# Altium PCB (OLD) Motors and Servos.PcbDoc
Units mm, origin at the board's own origin, x right, y up, seen from the top; angles counter-clockwise.
Board outline 88.2 x 113.22 mm, 2 copper layers (Top Layer, Bottom Layer); 83 components, 122 nets, 259 pads, 0 vias.
Unrouted connection lines stored in the file: 7.
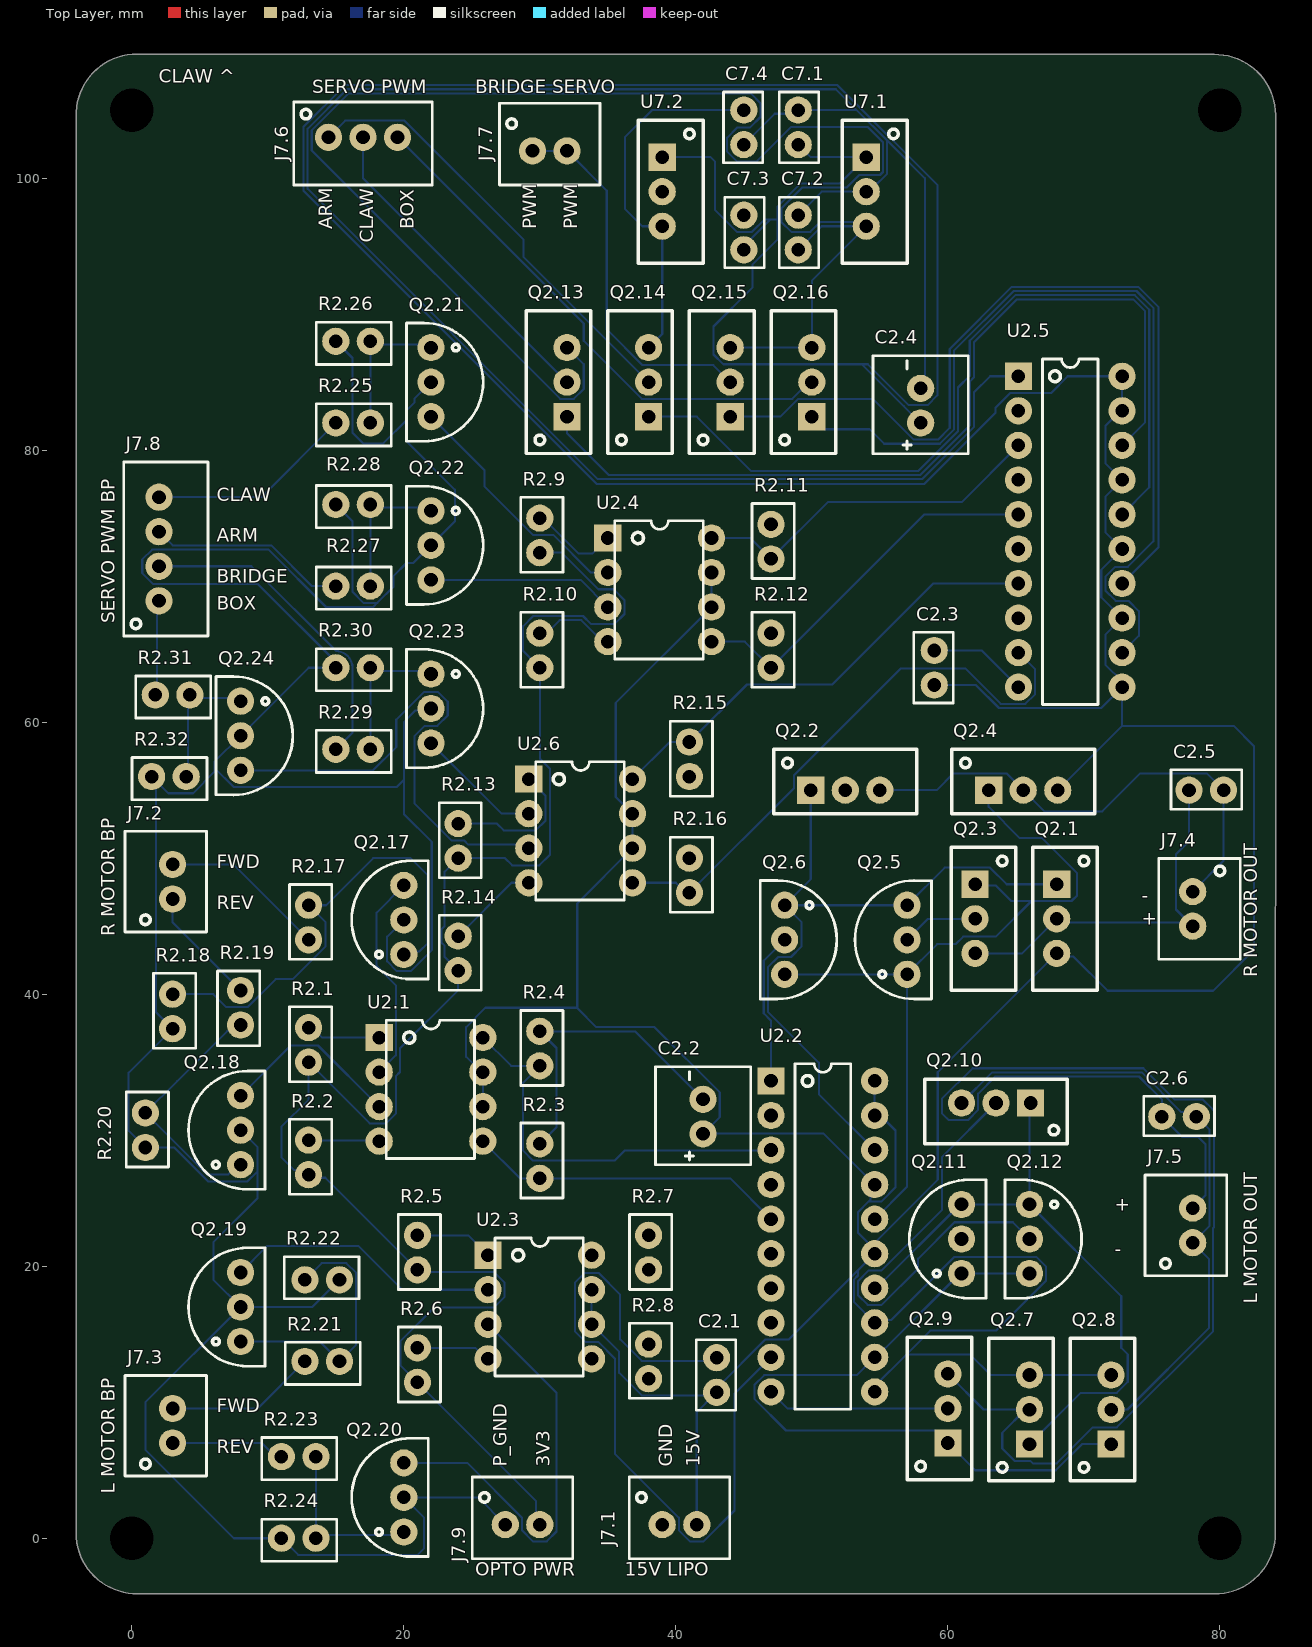
[diagram p0: Top Layer view]
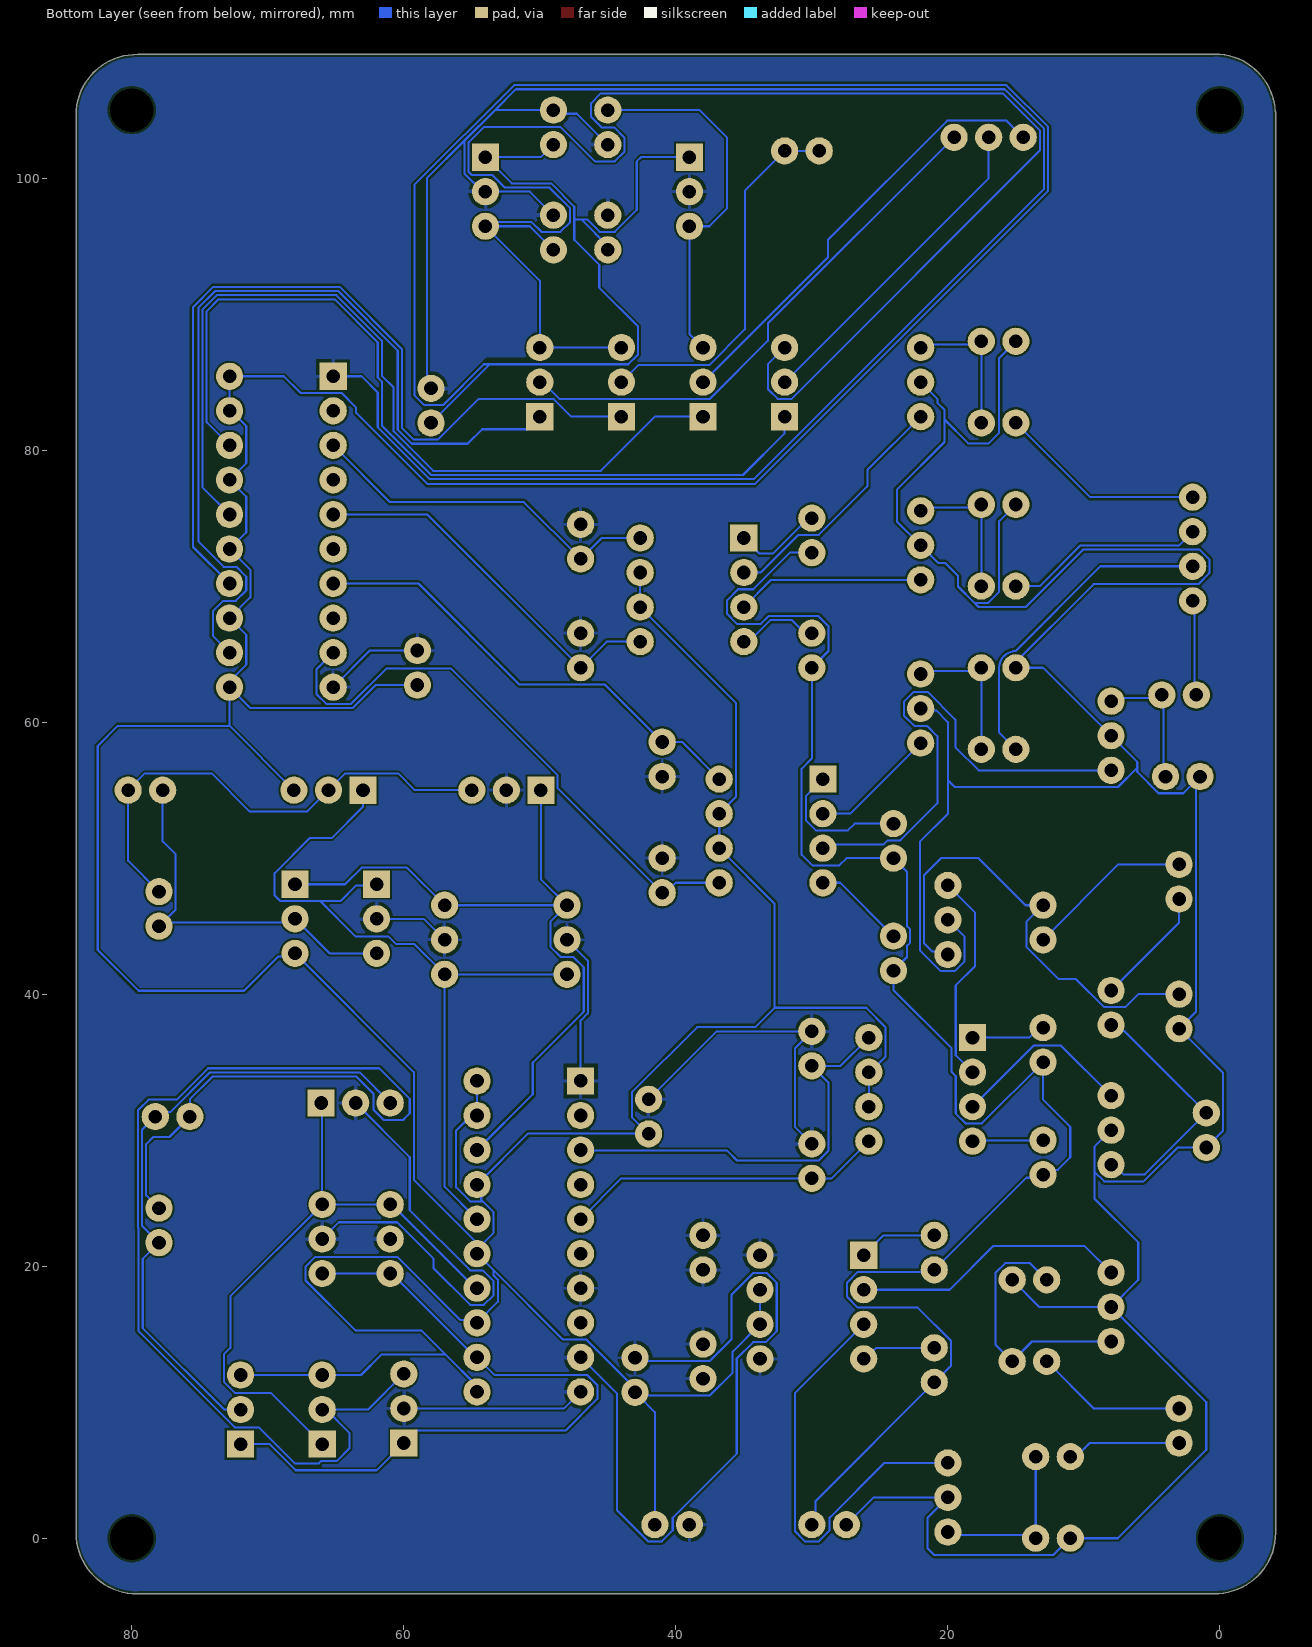
[diagram p1: Bottom Layer view, seen from below]
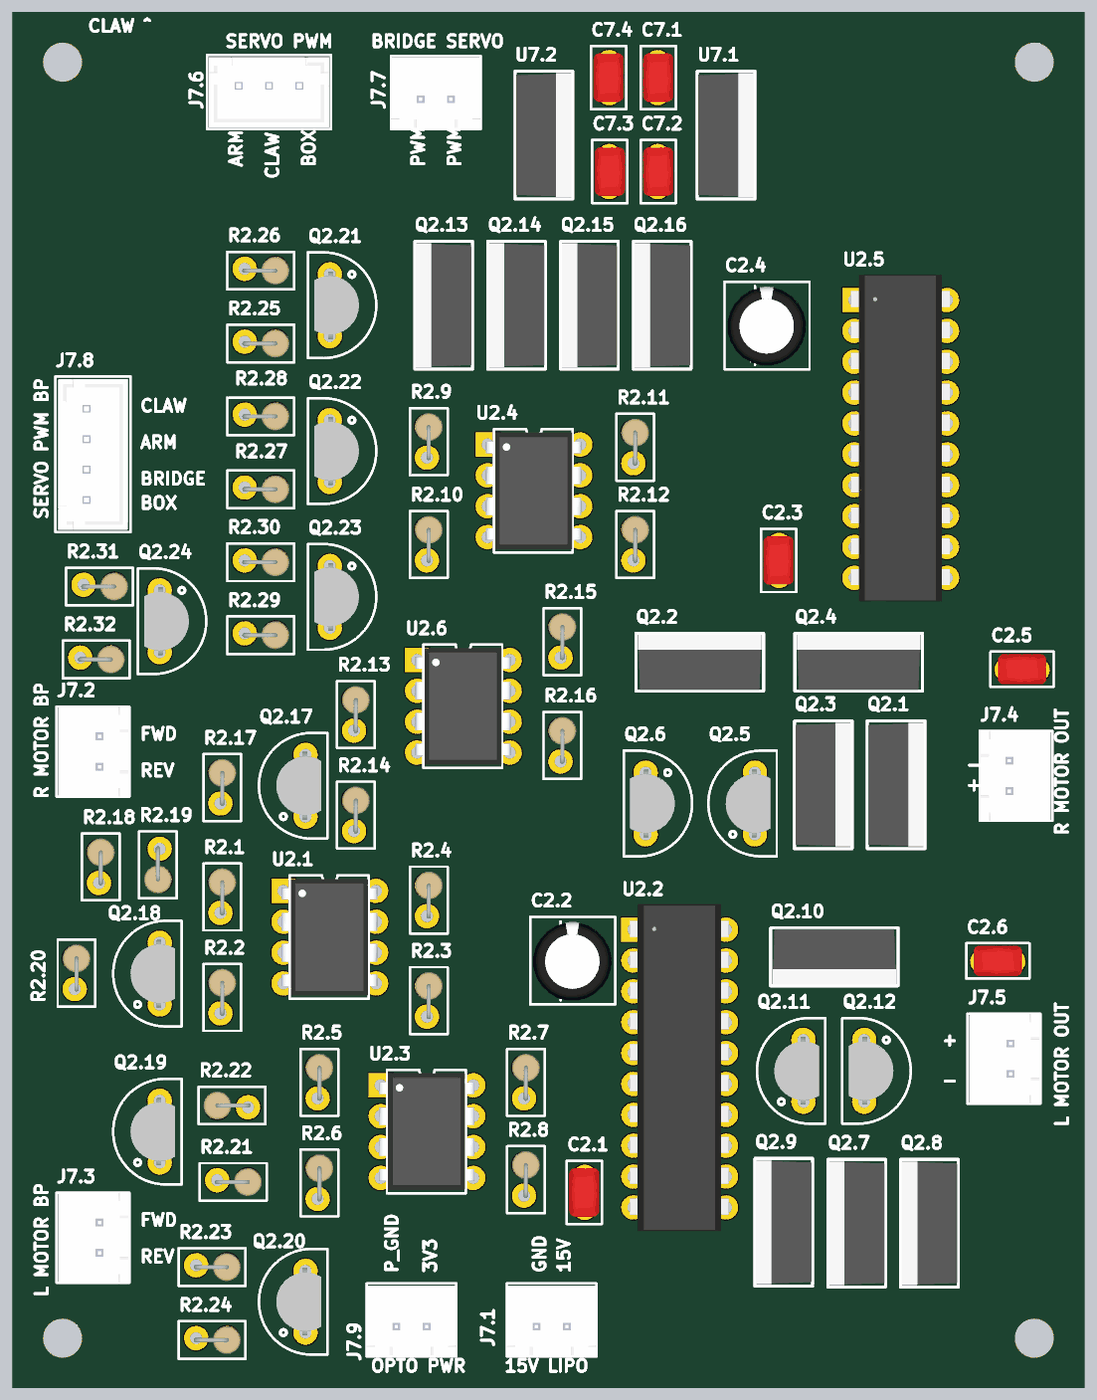
[diagram p2: 3D render of the assembled board from above, using the file's embedded part models]

## Layer stack, top to bottom
Top Solder: solder mask 0.0102, Solder Resist, Dk 3.5
Top Layer: signal copper 0.0356
Dielectric 1: dielectric 0.32, FR-4, Dk 4.8
Bottom Layer: signal copper 0.0356
Bottom Solder: solder mask 0.0102, Solder Resist, Dk 3.5

## Board outline
-4.1,0.387 ccw(c0.37,0.394) 0.443,-4.076 79.614,-4.1 ccw(c79.614,-4) 79.614,-4.1 ccw(c79.608,0.378) 84.086,0.378 ccw(c79.608,0.378) 84.086,0.452 84.1,92.5 ccw(c84,92.5) 84.1,92.5 84.1,104.623 ccw(c84,104.623) 84.098,104.644 ccw(c79.621,104.616) 79.556,109.093 ccw(c79.519,109) 79.519,109.1 0.445,109.1 ccw(c0.381,109.023) 0.381,109.123 ccw(c0.387,104.646) -4.084,104.868 ccw(c-4,104.814) -4.1,104.814

## Design rules (kind name [scope] priority, off if disabled: settings)
BoardOutlineClearance [All] p1: gap=0.2 ignorepadtopadclearanceinfootprint=FALSE
Clearance [All] p1: gap=0.152 ignorepadtopadclearanceinfootprint=FALSE
HoleSize [All] p1: absolutevalues=TRUE maxlimit=100 minlimit=0.4 maxpercent=80.000 minpercent=20.000
PolygonConnect [All] p1: connectstyle=Relief reliefconductorwidth=0.254 reliefentries=4 polygonreliefangle="90 Angle" airgapwidth=0.254
RoutingVias [All] p1: holewidth=0.4 width=0.8 viastyle="Through Hole" minholewidth=0.4 minwidth=0.6 maxholewidth=100 maxwidth=100
SilkToSilkClearance [All] p1: silktosilkclearance=0
SilkToSolderMaskClearance [IsPad] p1: minsilkscreentomaskgap=0 clearancetoexposedcopper=TRUE
SolderMaskExpansion [All] p1: expansion=0.102 istentingtop=FALSE
Width [All] p1: maxlimit=100 minlimit=0.152 preferedwidth=0.152
27 further rules are at their usual default settings.

## Components (designator, comment, footprint, x,y, rotation, side; value= is the part's Value field where it differs from the comment)
C2.1 "100p" "Non Polarized Cap" 43,12 r90 top
C2.2 "100u" "Polarized Cap" 42,31 r90 top
C2.3 "100p" "Non Polarized Cap" 59,64 r90 top
C2.4 "100u" "Polarized Cap" 58,83.27 r90 top
C2.5 "100n" "Non Polarized Cap" 79,55 r0 top
C2.6 "100n" "Non Polarized Cap" 77,31 r0 top
C7.1 "470n" "Non Polarized Cap" 49,103.73 r270 top
C7.2 "100n" "Non Polarized Cap" 49,96 r270 top
C7.3 "470n" "Non Polarized Cap" 45,96 r270 top
C7.4 "100n" "Non Polarized Cap" 45,103.73 r90 top
J7.1 "15V Lipo" "2pos JST" 40.27,1 r0 top
J7.2 "Right Motor BP" "2pos JST" 3,48.27 r90 top
J7.3 "Left Motor BP" "2pos JST" 3,8.27 r90 top
J7.4 "2pos" "2pos JST" 78,46.27 r270 top
J7.5 "2pos" "2pos JST" 78,23 r90 top
J7.6 "3pos" "3pos JST" 17,103 r0 top
J7.7 "2pos" "2pos JST" 30.73,102 r0 top
J7.8 "4pos" "4Pos JST" 2,72.73 r90 top
J7.9 "Optocoupler Power, Gnd" "2pos JST" 28.73,1 r0 top
Q2.1 "IRFZ44" TO220 68,45.54 r270 top
Q2.2 "IRFZ44" TO220 52.46,55 r0 top
Q2.3 "IRFZ44" TO220 62,45.54 r270 top
Q2.4 "IRFZ44" TO220 65.54,55 r0 top
Q2.5 "VN2222LL" VN2222LL 57,44 r90 top
Q2.6 "VN2222LL" VN2222LL 48,44 r270 top
Q2.7 "IRFZ44" TO220 66,9.46 r90 top
Q2.8 "IRFZ44" TO220 72,9.46 r90 top
Q2.9 "IRFZ44" TO220 60,9.54 r90 top
Q2.10 "IRFZ44" TO220 63.54,32 r180 top
Q2.11 "VN2222LL" VN2222LL 61,22 r90 top
Q2.12 "VN2222LL" VN2222LL 66,22 r270 top
Q2.13 "IRFZ44" TO220 32,85 r90 top
Q2.14 "IRFZ44" TO220 38,85 r90 top
Q2.15 "IRFZ44" TO220 44,85 r90 top
Q2.16 "IRFZ44" TO220 50,85 r90 top
Q2.17 "VN2222LL" VN2222LL 20,45.46 r90 top
Q2.18 "VN2222LL" VN2222LL 8,30 r90 top
Q2.19 "VN2222LL" VN2222LL 8,17 r90 top
Q2.20 "VN2222LL" VN2222LL 20,3 r90 top
Q2.21 "VN2222LL" VN2222LL 22,85 r270 top
Q2.22 "VN2222LL" VN2222LL 22,73 r270 top
Q2.23 "VN2222LL" VN2222LL 22,61 r270 top
Q2.24 "VN2222LL" VN2222LL 8,59 r270 top
R2.1 "330" Res_Generic 13,36.27 r90 top
R2.2 "330" Res_Generic 13,28 r90 top
R2.3 "1k" Res_Generic 30,27.73 r90 top
R2.4 "1k" Res_Generic 30,36 r90 top
R2.5 "330" Res_Generic 21,21 r90 top
R2.6 "330" Res_Generic 21,12.73 r90 top
R2.7 "1k" Res_Generic 38,21 r90 top
R2.8 "1k" Res_Generic 38,13 r90 top
R2.9 "330" Res_Generic 30,73.73 r90 top
R2.10 "330" Res_Generic 30,65.27 r90 top
R2.11 "1k" Res_Generic 47,73.27 r90 top
R2.12 "1k" Res_Generic 47,65.27 r90 top
R2.13 "330" Res_Generic 24,51.27 r90 top
R2.14 "330" Res_Generic 24,43 r90 top
R2.15 "1k" Res_Generic 41,57.27 r90 top
R2.16 "1k" Res_Generic 41,48.73 r90 top
R2.17 "1k" Res_Generic 13,45.27 r90 top
R2.18 "10k" Res_Generic 3,38.73 r90 top
R2.19 "1k" Res_Generic 8,39 r270 top
R2.20 "10k" Res_Generic 1,30 r90 top
R2.21 "1k" Res_Generic 14,13 r0 top
R2.22 "10k" Res_Generic 14,19 r180 top
R2.23 "1k" Res_Generic 12.27,6 r0 top
R2.24 "10k" Res_Generic 12.27,0 r0 top
R2.25 "1k" Res_Generic 16.27,82 r0 top
R2.26 "10k" Res_Generic 16.27,88 r0 top
R2.27 "1k" Res_Generic 16.27,70 r0 top
R2.28 "10k" Res_Generic 16.27,76 r0 top
R2.29 "1k" Res_Generic 16.27,58 r0 top
R2.30 "10k" Res_Generic 16.27,64 r0 top
R2.31 "1k" Res_Generic 3,62 r0 top
R2.32 "10k" Res_Generic 2.73,56 r0 top
U2.1 "MCT6" DIP8 22,33 r0 top
U2.2 "LT1161IN" DIP20 50.81,22.19 r0 top
U2.3 "MCT6" DIP8 30,17 r0 top
U2.4 "MCT6" DIP8 38.81,69.73 r0 top
U2.5 "LT1161IN" DIP20 69,74 r0 top
U2.6 "MCT6" DIP8 33,52 r0 top
U7.1 "5V SNS" TO220 54,99 r270 top
U7.2 "5V SNS" TO220 39,99 r270 top

## Footprints (in the part's own frame and the unit in brackets; to place one, negate y for a bottom-side part, rotate by r counter-clockwise, add the part's x,y. Pads: shape width x height; smd on the part's side, far side on the other; paste and mask are expansions set on the pad)
"2pos JST" [mm]
  round 2 hole 1: 1(-1.27,0) 2(1.27,0)
  silkscreen extent -3.7,-2.5 3.7,3.5, body extent -3.7,-2.4 3.7,3.35, height 7.01
"3pos JST" [mm]
  round 2 hole 1: 1(-2.54,0) 2(0,0) 3(2.54,0)
  silkscreen extent -5.1,-3.5 5.1,2.6, body extent -4.95,-3.35 4.95,2.4, height 7
"4Pos JST" [mm]
  round 2 hole 1: 1(-3.81,0) 2(-1.27,0) 3(1.27,0) 4(3.81,0)
  silkscreen extent -6.4,-3.6 6.4,2.6, body extent -6.2,-3.38 6.2,2.37, height 7.01
DIP8 [mm]
  rect 2x2 hole 1: 1(-3.81,3.81)
  round 2 hole 1: 2(-3.81,1.27) 3(-3.81,-1.27) 4(-3.81,-3.81) 5(3.81,-3.81) 6(3.81,-1.27) 7(3.81,1.27) 8(3.81,3.81)
  silkscreen extent -3.3,-5.08 3.2,5.08, body extent -3.96,-4.79 3.91,4.79, height 5.33
DIP20 [mm]
  rect 2x2 hole 1: 1(-3.81,11.43)
  round 2 hole 1: 2(-3.81,8.89) 3(-3.81,6.35) 4(-3.81,3.81) 5(-3.81,1.27) 6(-3.81,-1.27) 7(-3.81,-3.81) 8(-3.81,-6.35) 9(-3.81,-8.89) 10(-3.81,-11.43) 11(3.81,-11.43) 12(3.81,-8.89) 13(3.81,-6.35) 14(3.81,-3.81) 15(3.81,-1.27) 16(3.81,1.27) 17(3.81,3.81) 18(3.81,6.35) 19(3.81,8.89) 20(3.81,11.43)
  silkscreen extent -2.04,-12.7 2.04,12.7, body extent -4.09,-13.39 4.04,13.53, height 3.81
"Non Polarized Cap" [mm] "Cap Generic THT"
  round 2 hole 1: 1(-1.27,0) 2(1.27,0)
  silkscreen extent -2.6,-1.4 2.6,1.5, body extent -2,-1.2 2,1.3, height 6
"Polarized Cap" [mm]
  round 2 hole 1: 1(-1.27,0) 2(1.27,0)
  silkscreen extent -3.53,-3.5 3.66,3.5, body extent -3.25,-3.22 3.25,3.28, height 11.37
Res_Generic [mm] "Cap Generic THT Footprint"
  round 2 hole 1: 1(-1.27,0) 2(1.27,0)
  silkscreen extent -2.71,-1.7 2.8,1.4, body extent -1.47,-1.3 2.4,1, height 8.18
TO220 [mm]
  rect 2x2 hole 1: 1(-2.54,0)
  round 2 hole 1: 2(0,0) 3(2.54,0)
  silkscreen extent -5.25,-1.75 5.25,3, body extent -5.08,-1.66 5.08,2.91, height 19.6
VN2222LL [mm]
  round 2 hole 1: 1(-2.54,0) 2(0,0) 3(2.54,0)
  silkscreen extent -4.35,-1.8 4.35,3.83, body extent -2.78,-1.28 2.78,2.4, height 7.82

## Part data
C2.1 C2.3 C2.5 C2.6 C7.1 C7.2 C7.3 C7.4: library part Cap_Generic
C2.2 C2.4: library part "Polarized Cap"
J7.1 J7.2 J7.3 J7.4 J7.5 J7.7 J7.9: library part "2pos Conn", "2pos Conn JST"
J7.6: library part "3pos Conn", "3pos Conn"
J7.8: library part "4pos Conn", "4pos Conn"
Q2.1 Q2.2 Q2.3 Q2.4 Q2.7 Q2.8 Q2.9 Q2.10 Q2.13 Q2.14 Q2.15 Q2.16: library part "IRFZ44 NMOS", "IRFZ44EPBF N-Channel 60 V 48A 110W Through Hole TO-220AB", Supplier Part Number 1=IRFZ44ZLPBF-ND, Supplier 1=Digi-Key
Q2.5 Q2.6 Q2.11 Q2.12 Q2.17 Q2.18 Q2.19 Q2.20 Q2.21 Q2.22 Q2.23 Q2.24: library part "VN2222LL NMOS", "VN2222LL N-Channel 60 V 150mA 400mW Through Hole TO-92 (TO-226)", Supplier Part Number 1=689-VN2222LL-G, Supplier 1=Mouser
R2.1 R2.2 R2.3 R2.4 R2.5 R2.6 R2.7 R2.8 R2.9 R2.10 R2.11 R2.12 R2.13 R2.14 R2.15 R2.16 R2.17 R2.18 R2.19 R2.20 R2.21 R2.22 R2.23 R2.24 R2.25 R2.26 R2.27 R2.28 R2.29 R2.30 R2.31 R2.32: library part Res_Generic
U2.1 U2.3 U2.4 U2.6: library part "MCT6 Optocoupler", "Optoisolator 5.3KV 2CH TRANS 8-DIP", Supplier Part Number 1=512-MCT6, Supplier 1=Mouser
U2.2 U2.5: library part "LT1161IN Gate Driver", "LT1161IN High-Side Gate Driver IC Non-Inverting 20-PDIP", Supplier Part Number 1=LT1161IN#PBF-ND, Supplier 1=Digi-Key
U7.1 U7.2: library part "UA7805 5V Reg", "UA7805 IC REG LINEAR 5V 1.5A TO220-3", Supplier Part Number 1=296-39515-5-ND, Supplier 1=Digi-Key

## Free pads (board coordinates)
  round 0 hole 3.2: ""(0,0) ""(0,105) ""(80,0) ""(80,105)

## Nets (pads, with @x,y where several pads share a name; then routed paths per layer and width w, separated by ;. In a path a pad name is that pad's centre, name@x,y a point inside that pad or via, vN(x,y) a via of type N, cw(c..) or ccw(c..) an arc to the next point about the centre after c; other vN are vias at no path point)
3.3V_P: J7.9.2 R2.1.1 R2.2.1 R2.5.1 R2.6.1 R2.9.1 R2.10.1 R2.13.1 R2.14.1 | length 128
  Bottom Layer w0.152: 22.988,44.996 22.771,44.779 22.771,43.785 23,43.556 23,42.73 R2.14.1 24,40.297 19.723,36.02 19.723,34.282 19.419,33.977 19.419,31.221 18.699,30.501 17.499,30.501 R2.1.1 13,32.245 11,30.245 11,28 11.919,27.081 12.649,27.081 13.229,26.501 14.229,26.501 R2.5.1 21.149,19.581 26.616,19.581 27.419,18.779 27.419,17.761 26.616,16.959 22.221,16.959 19.771,14.509 19.771,12.689 R2.6.1 29.731,2.729 29.731,1.269 J7.9.2 ; 23,44.984 23,49 R2.13.1 27.438,50 27.973,49.466 29.966,49.466 30.75,50.25 30.75,56.573 30,57.323 R2.10.1 28.771,65.229 28.771,67.049 29.527,67.805 33.175,67.805 33.748,67.231 35.509,67.231 36.229,67.951 36.229,68.969 35.426,69.771 34.307,69.771 31.619,72.46 R2.9.1
5V_ARM: C7.4.2 Q2.14.3 U7.2.3 | length 27.4
  Bottom Layer w0.152: Q2.14.3 39,88.54 U7.2.3 37.54,96.46 36.25,97.75 36.25,103 38.25,105 C7.4.2
5V_P: 
5V_SERVO: C7.2.2 Q2.13.3 Q2.15.3 Q2.16.3 U7.1.3 | length 126.7
  Bottom Layer w0.152: Q2.13.3 33.229,86.311 33.229,84.491 32.509,83.771 31.491,83.771 13.231,102.031 13.231,103.509 15.951,106.229 45.509,106.229 46.229,105.509 46.229,104.491 45.468,103.73 44.532,103.73 43.771,102.969 43.771,101.951 44.491,101.231 45.951,101.231 48.491,103.771 54.092,103.771 55.229,102.635 55.229,100.445 55.012,100.229 53.491,100.229 52.567,99.305 49.297,99.305 47.771,97.779 47.771,96.761 48.491,96.041 49.88,96.041 50.604,96.765 53.695,96.765 U7.1.3 ; Q2.15.3 Q2.16.3 50,92.46 U7.1.3 ; C7.2.2 50.73,96.46 U7.1.3
8V: 
15V: C2.1.1 C2.2.1 C2.3.1 C2.4.1 C7.1.2 C7.3.2 J7.1.2 Q2.1.3 Q2.4.3 Q2.7.3 Q2.8.3 U2.1.6 U2.1.7 U2.2.11 U2.2.13 U2.2.15 U2.2.17 U2.2.19 U2.2.20 U2.3.6 U2.3.7 U2.4.6 U2.4.7 U2.5.11 U2.5.13 U2.5.15 U2.5.17 U2.5.19 U2.5.20 U2.6.6 U2.6.7 U7.1.1 U7.2.1 | length 525.2
  Bottom Layer w0.152: U2.1.6 25.81,34.16 24.581,35.389 24.581,37.581 26,39 32.73,39 34.155,37.575 38.433,37.575 43.229,32.779 43.229,30.959 C2.2.1 ; 32.75,38.98 32.75,46.67 U2.6.6 U2.6.7 35.581,54.499 35.581,61.421 U2.4.6 U2.4.7 ; U2.3.7 U2.3.6 35.827,13.713 35.827,12.165 37.491,10.501 C2.1.1@42.771,10.501 ; U7.2.1 42.562,101.54 42.871,101.231 42.871,97.662 44.491,96.041 45.603,96.041 46.527,96.965 46.958,96.965 ; J7.1.2 41.54,9.27 C2.1.1@42.771,10.501 ; C2.2.1@42.039,29.769 50.851,29.769 U2.2.17 54.305,25.685 54.305,24.882 54.194,24.771 ; C7.3.2 45,95.007 46.958,96.965 ; C7.1.2 49.92,101.54 U7.1.1 52.07,99.61 49.171,99.61 47.467,97.905 47.467,96.965 ; 53.718,86.282 56.771,83.229 C2.4.1 ; U2.2.15@54.512,21.615 59.258,26.361 59.258,34.258 Q2.1.3 68.229,42.771 69.229,42.771 71.75,40.25 79.5,40.25 82.5,43.25 82.5,58.25 81.02,59.73 72.81,59.73 ; U2.2.11 54.62,11.191 56.929,13.5 ; U2.2.20 U2.2.19 55.051,31.08 56.153,29.978 56.153,25.796 55.129,24.771 54.194,24.771 ; C2.3.1 62.065,62.73 63.759,61.037 71.277,61.037 U2.5.11 ; Q2.4.3 72.81,59.73 ; Q2.8.3 Q2.7.3 63.15,12 61.65,13.5 56.929,13.5 ; C2.1.1@42.771,10.501 C2.1.1 43,11.038 46.574,14.611 48.311,14.611 53.391,19.691 ; 46.958,96.965 47.467,96.965 ; 47.467,96.965 47.467,95.459 45.631,93.624 45.631,91.945 42.771,89.085 42.771,87.031 43.491,86.311 54.12,86.311 57.12,83.311 58.509,83.311 59.229,84.031 59.229,99.497 51.887,106.838 15.699,106.838 12.622,103.761 12.622,99.084 34.206,77.5 58.25,77.5 63.5,82.75 63.5,83.125 64.576,84.201 67.588,84.201 68.817,85.43 U2.5.20 72.81,83 71.581,81.771 71.581,79.039 U2.5.17 71.581,76.581 71.581,73.959 U2.5.15 71.277,71.197 71.277,69.183 U2.5.13 71.581,66.421 71.581,64.23 72.81,63.001 U2.5.11 ; 53.391,19.691 53.391,19.32 53.087,19.015 53.087,17.373 U2.2.13 54.826,16.046 55.849,16.046 60.491,20.689 66.509,20.689 67.229,19.969 67.229,18.951 63.543,15.265 58.694,15.265 56.929,13.5 ; 53.391,19.691 U2.2.15 54.425,21.115 54.425,21.42 53.391,22.453 53.391,23.969 54.194,24.771 ; 72.81,59.73 U2.5.11
ARM_SERV_BP_IN: J7.8.3 R2.27.1 | length 14.7
  Bottom Layer w0.152: J7.8.3 3,73 10.25,73 13.25,70 R2.27.1
ARM_SERV_BP_OUT: 
ARM_SERV_PWM: J7.6.1 Q2.14.2 | length 32.8
  Bottom Layer w0.152: J7.6.1 15.689,104.229 20.049,104.229 28.816,95.462 28.816,94.184 Q2.14.2
BOX_SERV_BP_IN: J7.8.1 R2.31.1 | length 7
  Bottom Layer w0.152: R2.31.1 1.865,62.135 1.865,68.785 J7.8.1
BOX_SERV_BP_OUT: 
BOX_SERV_PWM: J7.6.3 Q2.16.2 | length 39.7
  Bottom Layer w0.152: J7.6.3 33.229,89.311 33.229,88.034 37.491,83.771 48.557,83.771 49.786,85 Q2.16.2
BRIDGE_SERV_BP_IN: J7.8.2 R2.29.1 | length 24
  Bottom Layer w0.152: J7.8.2 8.79,71.46 15.022,65.228 cw(c15,64) 16.228,64.022 16.229,59.229 R2.29.1
BRIDGE_SERV_BP_OUT: 
BRIDGE_SERV_PWM: J7.7.1 J7.7.2 Q2.15.2 | length 27.6
  Bottom Layer w0.152: J7.7.1 J7.7.2 34.922,99.078 34.922,88.88 37.552,86.25 42.75,86.25 Q2.15.2
CLAW_SERV_BP_IN: J7.8.4 R2.25.1 | length 15.3
  Bottom Layer w0.152: J7.8.4 9.54,76.54 R2.25.1
CLAW_SERV_BP_OUT: 
CLAW_SERV_PWM: J7.6.2 Q2.13.2 | length 24.2
  Bottom Layer w0.152: J7.6.2 17,100 Q2.13.2
DCLK: 
DIO: 
ECHO_F_M: 
ECHO_S_L: 
ECHO_S_R: 
ECHO_SPARE: 
ENCODER_L: 
ENCODER_R: 
IR_LEFT_TRANS: 
IR_RIGHT_TRANS: 
IR_SNS_LEFT: 
IR_SNS_RIGHT: 
LEFT+: C2.6.1 J7.5.2 Q2.7.2 Q2.9.3 | length 99.7
  Bottom Layer w0.152: Q2.9.3 62.62,9.46 Q2.7.2@65.71,9.46 ; Q2.7.2 Q2.7.2@65.71,9.46 ; J7.5.2 78.945,25.215 78.945,28.975 78.42,29.5 77.23,29.5 C2.6.1 75.73,32.27 74.055,33.945 63.482,33.945 62.229,32.692 62.229,31.491 61.488,30.75 60.055,30.75 59.966,30.839 59.563,31.242 59.563,32.301 61.817,34.555 74.376,34.555 76.681,32.25 78.758,32.25 79.466,31.542 79.466,31.534 79.555,31.445 79.555,22.854 79.5,22.799 79.5,15.222 72.426,8.149 70.662,8.149 68.014,5.5 66.25,5.5 66.087,5.663 64.934,5.663 64,6.597 64,7.75 Q2.7.2@65.71,9.46
LEFT-: C2.6.2 J7.5.1 Q2.8.2 Q2.10.3 | length 46.2
  Bottom Layer w0.152: Q2.10.3 63.25,34.25 74.25,34.25 77.169,31.331 77.939,31.331 79.25,30.02 79.25,22.98 J7.5.1 79.195,20.535 79.195,15.445 73.21,9.46 Q2.8.2
LEFT_FWD: Q2.7.1 Q2.10.1 Q2.11.3 Q2.12.1 U2.2.14 | length 46.6
  Bottom Layer w0.152: U2.2.14 54.73,18.38 60.89,24.54 Q2.11.3 Q2.12.1 ; Q2.7.1 69.769,10.689 72.426,10.689 73.229,11.491 73.229,13.521 72.75,14 72.75,17.79 Q2.12.1 ; Q2.10.1 66,31.92 Q2.12.1
LEFT_FWD_BP_IN: J7.3.2 R2.21.1 | length 11.2
  Bottom Layer w0.152: J7.3.2 9.27,9.54 R2.21.1
LEFT_FWD_BP_OUT: 
LEFT_REV: Q2.8.1 Q2.9.1 Q2.11.1 Q2.12.3 U2.2.12 | length 53.8
  Bottom Layer w0.152: Q2.12.3 Q2.11.1 60.89,19.46 54.73,13.3 U2.2.12 53.309,11.989 48.983,11.989 46.491,11.989 45.771,11.269 45.771,10.251 48.099,7.924 59.076,7.924 62,5 67.945,5 69.865,6.92 Q2.8.1
LEFT_REV_BP_IN: J7.3.1 R2.23.1 | length 8.4
  Bottom Layer w0.152: J7.3.1 9.555,7 10.555,6 R2.23.1
LEFT_REV_BP_OUT: 
M_GND: C2.1.2 C2.2.2 C2.3.2 C2.4.2 C7.1.1 C7.2.1 C7.3.1 C7.4.1 J7.1.1 Q2.2.2 Q2.3.2 Q2.5.2 Q2.6.2 Q2.9.2 Q2.10.2 Q2.11.2 Q2.12.2 R2.3.2 R2.4.2 R2.7.1 R2.7.2 R2.8.1 R2.8.2 R2.11.2 R2.12.2 R2.15.1 R2.16.2 U2.2.1 U2.2.7 U2.2.9 U2.2.10 U2.3.5 U2.3.8 U2.5.1 U2.5.10 U7.1.2 U7.2.2 | length 307
  Bottom Layer w0.152: R2.3.2 31.229,30.229 31.229,36.041 R2.4.2 37,37.27 C2.2.2 ; C2.1.2 42.771,13.041 37.491,13.041 35.905,14.627 35.905,17.913 34.319,19.499 33.301,19.499 32.581,18.779 32.581,15.221 33.384,14.419 34.319,14.419 35.523,13.215 35.523,6.215 40.229,1.509 40.229,0.574 41.031,-0.229 42.049,-0.229 44.316,2.038 44.316,10.616 U2.2.9 ; C7.3.1 C7.3.1@45.165,97.435 ; C7.4.1 47.271,104.731 48.731,104.731 C7.1.1 53.294,105 ; U2.2.10@46.75,11.5 47,11.25 U2.2.10 48.229,9.531 59.991,9.531 Q2.9.2 ; U2.2.1 47,38.053 46.467,38.586 46.467,42.467 Q2.6.2 ; C7.2.1 50.73,99 53.569,99 53.874,99.305 54.519,99.305 55.533,100.319 55.533,102.761 ; Q2.5.2 58.54,45.54 Q2.3.2 ; C2.4.2 58.305,84.845 58.305,99.99 55.533,102.761 ; C2.3.2 62.49,65.27 U2.5.10 ; Q2.10.2 59.563,28.023 59.563,24.126 55.129,19.691 54.194,19.691 53.391,18.889 53.391,17.871 54.111,17.151 55.129,17.151 57.81,19.832 57.81,20.548 60.491,23.229 64.771,23.229 Q2.12.2 ; U2.5.1 63.106,85.43 61.914,84.238 61.914,81.685 58.098,77.868 34.269,77.868 12.927,99.21 12.927,103.635 15.825,106.533 51.761,106.533 53.294,105 ; 53.294,105 55.533,102.761
MAGNET_SNS: 
NetC1.1_1: 
NetC1.1_2: 
NetC1.2_1: 
NetC1.2_2: 
NetC4.1_2: 
NetQ2.13_1: Q2.13.1 U2.5.18 | length 64.7
  Bottom Layer w0.152: Q2.13.1 32,81.231 35.059,78.173 57.971,78.173 61.61,81.811 61.61,85.035 61.914,85.34 61.914,87.914 65.086,91.086 73.621,91.086 74.5,90.207 74.5,82.04 U2.5.18
NetQ2.14_1: Q2.14.1 U2.5.16 | length 63.5
  Bottom Layer w0.152: Q2.14.1 41.54,82.46 45.522,78.478 57.845,78.478 60.748,81.38 60.748,84.604 61.61,85.466 61.61,88.041 64.959,91.39 73.748,91.39 74.805,90.333 74.805,77.265 U2.5.16
NetQ2.15_1: Q2.15.1 U2.5.14 | length 63.4
  Bottom Layer w0.152: Q2.15.1 47.677,82.46 48.967,83.75 54.512,83.75 57.491,80.771 59.277,80.771 60.138,81.633 60.138,87.432 64.707,92 74,92 75.5,90.5 75.5,72.88 U2.5.14
NetQ2.16_1: Q2.16.1 U2.5.12 | length 63.9
  Bottom Layer w0.152: Q2.16.1 50.924,81.536 54.245,81.536 55.314,80.467 59.403,80.467 60.443,81.507 60.443,87.305 64.833,91.695 73.874,91.695 75.11,90.459 75.11,73.292 73.236,71.419 72.301,71.419 71.581,70.699 71.581,69.681 72.342,68.92 73.278,68.92 74.039,68.159 74.039,66.339 U2.5.12
NetQ2.17_1: Q2.17.1 R2.17.2 R2.18.2 | length 34.8
  Bottom Layer w0.152: R2.18.2 5.992,40 6.951,39.041 8.509,39.041 10.578,41.11 11.848,41.11 14.229,43.491 14.229,45.311 R2.17.2 14.29,46.54 17.75,50 20.5,50 21.75,48.75 21.75,43.75 21.139,43.139 20.219,43.139 Q2.17.1
NetQ2.17_3: Q2.17.3 U2.1.2 | length 15.7
  Bottom Layer w0.152: U2.1.2 19.419,35.499 19.419,40.649 18,42.068 18,46 Q2.17.3
NetQ2.18_1: Q2.18.1 R2.19.2 R2.20.2 | length 18.8
  Bottom Layer w0.152: Q2.18.1 7.809,27.46 7.099,26.75 5.52,26.75 R2.20.2 3.336,33.606 7.014,37.284 7.054,37.284 7.5,37.73 R2.19.2
NetQ2.18_3: Q2.18.3 U2.1.3 | length 13.6
  Bottom Layer w0.152: Q2.18.3 11.689,36.229 13.691,36.229 U2.1.3
NetQ2.19_1: Q2.19.1 R2.21.2 R2.22.2 | length 19.5
  Bottom Layer w0.152: Q2.19.1 13.81,14.46 R2.21.2 16.499,14.229 16.499,19.509 15.779,20.229 13.959,20.229 R2.22.2
NetQ2.19_3: Q2.19.3 U2.3.2 | length 20.3
  Bottom Layer w0.152: Q2.19.3 9.96,21.5 16.644,21.5 19.874,18.27 U2.3.2
NetQ2.20_1: Q2.20.1 R2.23.2 R2.24.2 | length 13
  Bottom Layer w0.152: R2.23.2 R2.24.2 13.77,0.23 19.77,0.23 Q2.20.1 Q2.20.1@20.23,0.23
NetQ2.20_3: Q2.20.3 U2.3.3 | length 31.8
  Bottom Layer w0.152: Q2.20.3 24.658,5.54 28.689,1.509 28.689,0.574 29.491,-0.229 30.509,-0.229 31.229,0.491 31.229,10.691 U2.3.3
NetQ2.21_1: Q2.21.1 R2.25.2 R2.26.2 | length 10.7
  Bottom Layer w0.152: R2.25.2 R2.26.2 17.77,87.77 21.77,87.77 Q2.21.1
NetQ2.21_3: Q2.21.3 U2.4.2 | length 18.4
  Bottom Layer w0.152: Q2.21.3 25.922,78.538 25.922,77.34 29.491,73.771 30.979,73.771 33.75,71 U2.4.2
NetQ2.22_1: Q2.22.1 R2.27.2 R2.28.2 | length 10.7
  Bottom Layer w0.152: R2.27.2 R2.28.2 17.77,75.77 21.77,75.77 Q2.22.1
NetQ2.22_3: Q2.22.3 U2.4.3 | length 13.8
  Bottom Layer w0.152: Q2.22.3 33,70.46 U2.4.3
NetQ2.23_1: Q2.23.1 R2.29.2 R2.30.2 | length 10.7
  Bottom Layer w0.152: R2.29.2 R2.30.2 17.77,63.77 21.77,63.77 Q2.23.1
NetQ2.23_3: Q2.23.3 U2.6.2 | length 9.3
  Bottom Layer w0.152: Q2.23.3 27.19,53.27 U2.6.2
NetQ2.24_1: Q2.24.1 R2.31.2 R2.32.2 | length 10
  Bottom Layer w0.152: R2.32.2 4.135,56.135 4.135,61.865 R2.31.2 4.5,61.77 7.77,61.77 Q2.24.1
NetQ2.24_3: Q2.24.3 U2.6.3 | length 37.9
  Bottom Layer w0.152: Q2.24.3 17.738,56.46 19.445,58.168 19.445,60.183 21.491,62.229 22.509,62.229 23.229,61.509 23.229,60.491 22.467,59.73 21.532,59.73 20.771,58.969 20.771,54.031 23.491,51.311 24.426,51.311 24.738,51 28.92,51 U2.6.3
NetR1.12_1: 
NetR1.14_2: 
NetR1.17_1: 
NetR1.19_2: 
NetR1.23_2: 
NetR1.24_2: 
NetR1.26_2: 
NetR1.28_2: 
NetR1.30_2: 
NetR2.1_2: R2.1.2 U2.1.1 | length 5.5
  Bottom Layer w0.152: R2.1.2 13.277,37.54 14.007,36.81 U2.1.1
NetR2.2_2: R2.2.2 U2.1.4 | length 5.2
  Bottom Layer w0.152: R2.2.2 13.04,29.23 18.15,29.23 U2.1.4
NetR2.3_1: R2.3.1 U2.1.5 U2.2.5 | length 23.6
  Bottom Layer w0.152: U2.1.5 28.54,26.46 R2.3.1 44,26.46 U2.2.5
NetR2.4_1: R2.4.1 U2.1.8 U2.2.3 | length 30.6
  Bottom Layer w0.152: U2.1.8 27.89,34.73 R2.4.1 28.771,33.501 28.771,28.491 29.491,27.771 35.499,27.771 36.229,28.501 46.961,28.501 U2.2.3
NetR2.5_2: R2.5.2 U2.3.1 | length 5.8
  Bottom Layer w0.152: R2.5.2 24.73,22.27 U2.3.1
NetR2.6_2: R2.6.2 U2.3.4 | length 5.5
  Bottom Layer w0.152: R2.6.2 25.262,14 26.072,13.19 U2.3.4
NetR2.9_2: R2.9.2 U2.4.1 | length 6.6
  Bottom Layer w0.152: R2.9.2 30.25,75 32.862,72.388 33.848,72.388 U2.4.1
NetR2.10_2: R2.10.2 U2.4.4 | length 6.1
  Bottom Layer w0.152: R2.10.2 30.5,66.54 31.46,67.5 33.049,67.5 34.629,65.92 U2.4.4
NetR2.11_1: R2.11.1 U2.4.8 U2.5.3 | length 26.7
  Bottom Layer w0.152: U2.4.8 45.46,73.54 R2.11.1 51.175,76.175 61.015,76.175 U2.5.3
NetR2.12_1: R2.12.1 U2.4.5 U2.5.5 | length 28
  Bottom Layer w0.152: U2.4.5 45.08,65.92 R2.12.1 58.27,75.27 U2.5.5
NetR2.13_2: R2.13.2 U2.6.1 | length 10.5
  Bottom Layer w0.152: R2.13.2 26.85,52.54 27.349,52.041 29.699,52.041 30.419,52.761 30.419,54.581 U2.6.1
NetR2.14_2: R2.14.2 U2.6.4 | length 6.8
  Bottom Layer w0.152: R2.14.2 27.92,48.19 U2.6.4
NetR2.15_2: R2.15.2 U2.5.7 U2.6.8 | length 34.3
  Bottom Layer w0.152: U2.6.8 39.54,58.54 R2.15.2 45.231,62.771 51.501,62.771 58.92,70.19 U2.5.7
NetR2.16_1: R2.16.1 U2.5.9 U2.6.5 | length 42.2
  Bottom Layer w0.152: U2.6.5 39.993,48.19 40.723,47.46 R2.16.1 48.691,55.151 48.691,56.095 56.555,63.959 61.268,63.959 63.885,61.341 65.699,61.341 66.419,62.061 66.419,63.881 U2.5.9
P_GND: J7.9.1 Q2.17.2 Q2.18.2 Q2.19.2 Q2.20.2 Q2.21.2 Q2.22.2 Q2.23.2 Q2.24.2 R2.18.1 R2.20.1 R2.22.1 R2.24.1 R2.26.1 R2.28.1 R2.30.1 R2.32.1 | length 253.7
  Bottom Layer w0.152: R2.32.1 R2.32.1@1.771,55.689 ; Q2.18.2 9.229,28.771 9.229,26.951 ; R2.30.1 13,64 Q2.24.2 6.078,57.078 6.078,56.645 ; R2.28.1 16.229,74.771 16.229,69.574 17.031,68.771 18.049,68.771 ; R2.26.1 16.229,86.771 16.229,81.271 17,80.5 18.5,80.5 20.25,82.25 ; R2.22.1 13.27,17 Q2.19.2 ; R2.30.1@15.305,64.126 9.282,70.149 1.574,70.149 0.771,70.951 0.771,71.969 1.491,72.689 10.061,72.689 14.283,68.467 17.744,68.467 18.049,68.771 ; Q2.17.2 18.771,44.231 18.771,42.411 19.491,41.691 20.509,41.691 22.055,43.237 22.055,51.195 20,53.25 20,55.75 ; Q2.23.2 21.861,60.861 20.861,60.861 20,60 20,55.75 ; Q2.21.2 20.771,83.771 20.771,83.494 20.25,82.972 20.25,82.25 ; J7.9.1 25.46,3 Q2.20.2 21.5,1.5 21.5,-0.75 21.021,-1.229 12.229,-1.229 R2.24.1 7.5,0 1,6.5 1,10 Q2.19.2 ; R2.32.1@1.771,55.689 2.689,54.771 4.509,54.771 6.078,56.34 6.078,56.645 ; R2.32.1@1.771,55.689 1.771,38.689 R2.18.1 -0.229,34.231 -0.229,29.959 R2.20.1 3.109,28.73 5.608,26.231 8.509,26.231 9.229,26.951 ; 6.078,56.645 7.491,55.231 19.481,55.231 20,55.75 ; Q2.19.2 6,19 6,21.75 9.229,24.979 9.229,26.951 ; 18.049,68.771 19.25,69.972 19.25,70.75 20.198,71.698 20.698,71.698 Q2.22.2 23.75,74.75 23.75,77.099 20.25,80.599 20.25,82.25
REF_F_L_COL: 
REF_F_L_LED: 
REF_F_L_SNS: 
REF_F_R_COL: 
REF_F_R_LED: 
REF_F_R_SNS: 
REF_R_COL: 
REF_R_LED: 
REF_R_SNS: 
REF_S_L_COL: 
REF_S_L_LED: 
REF_S_L_SNS: 
REF_S_R_COL: 
REF_S_R_LED: 
REF_S_R_SNS: 
RIGHT+: C2.5.1 J7.4.2 Q2.1.2 Q2.3.3 | length 27.8
  Bottom Layer w0.152: Q2.3.3 65.46,43 Q2.1.2 68.27,45.27 J7.4.2@77.73,45.27 ; C2.5.1 77.73,51.245 76.771,50.286 76.771,46.229 J7.4.2@77.73,45.27 ; J7.4.2 J7.4.2@77.73,45.27
RIGHT-: C2.5.2 J7.4.1 Q2.2.3 Q2.4.2 | length 37
  Bottom Layer w0.152: Q2.2.3 59.183,55 60.412,56.229 64.311,56.229 67.095,53.445 71.35,53.445 74.134,56.229 79.041,56.229 C2.5.2 80.27,49.81 J7.4.1
RIGHT_FWD: Q2.1.1 Q2.2.1 Q2.5.3 Q2.6.1 U2.2.18 | length 54.2
  Bottom Layer w0.152: Q2.2.1 49.92,48.46 Q2.6.1 ; U2.2.18 50.519,32.641 50.519,34.965 46.771,38.712 46.771,41.969 47.532,42.73 48.468,42.73 49.229,43.491 49.229,45.311 Q2.6.1 ; Q2.1.1 64.323,48.08 63.095,49.309 59.769,49.309 Q2.5.3 Q2.6.1
RIGHT_FWD_BP_IN: J7.2.2 R2.17.1 | length 12.3
  Bottom Layer w0.152: J7.2.2 7.46,49.54 R2.17.1
RIGHT_FWD_BP_OUT: 
RIGHT_REV: Q2.3.1 Q2.4.1 Q2.5.1 Q2.6.3 U2.2.16 | length 58.9
  Bottom Layer w0.152: Q2.6.3 Q2.5.1 ; U2.2.16 57,25.84 Q2.5.1 ; Q2.3.1 62.08,48 63.5,48 64.649,46.851 69.095,46.851 69.5,47.257 69.5,48.903 66.93,51.473 65.298,51.473 63,53.771 Q2.4.1 ; 66.154,46.851 63.531,44.229 61.12,44.229 60.566,43.675 59.215,43.675 Q2.5.1
RIGHT_REV_BP_IN: J7.2.1 R2.19.1 | length 8.8
  Bottom Layer w0.152: J7.2.1 3,45.27 R2.19.1
RIGHT_REV_BP_OUT: 
SPARE_1: 
SPARE_2: 
SPARE_3: 
SW_CLAW_+: 
SW_CLAW_SNS: 
SW_FRONT_+: 
SW_FRONT_SNS: 
SW_REAR_+: 
SW_REAR_SNS: 
TRIG_COM: 
pads on no net: U2.2.2 U2.2.4 U2.2.6 U2.2.8 U2.5.2 U2.5.4 U2.5.6 U2.5.8

## Polygon pours and split planes (outlines as drawn)
M_GND on Bottom Layer "GND " (solid, remove dead copper, pour order 0): -5.75,109.5 84.25,109.5 84.25,-5 -5.75,-5

## Silkscreen, mask and mechanical layers (free items; w line width, h text height)
Top Overlay:
  text "CLAW ^" at 2,107 h1
  text "SERVO PWM" at 13.254,106.254 h1
  text "BRIDGE SERVO" at 25.254,106.254 h1
  text "ARM" at 14.746,96.254 h1 r90
  text "BOX" at 20.746,96.254 h1 r90
  text "PWM" at 29.746,96.254 h1 r90
  text "PWM" at 32.746,96.254 h1 r90
  text "CLAW" at 17.746,95.254 h1 r90
  text "CLAW" at 6.254,76.254 h1
  text "ARM" at 6.254,73.254 h1
  text "BRIDGE" at 6.254,70.254 h1
  text "BOX" at 6.254,68.254 h1
  text "SERVO PWM BP" at -1.254,67.254 h1 r90
  text "FWD" at 6.254,49.254 h1
  text "-" at 74.254,46.754 h1
  text "REV" at 6.254,46.254 h1
  text "+" at 74.254,45.087 h1
  text "R MOTOR BP" at -1.254,44.254 h1 r90
  text "R MOTOR OUT" at 82.746,41.254 h1 r90
  text "+" at 72.254,24.087 h1
  text "-" at 72.254,20.754 h1
  text "L MOTOR OUT" at 82.746,17.254 h1 r90
  text "FWD" at 6.254,9.254 h1
  text "REV" at 6.254,6.254 h1
  text "P_GND" at 27.579,5.254 h1 r90
  text "3V3" at 30.746,5.254 h1 r90
  text "GND" at 39.746,5.254 h1 r90
  text "15V" at 41.746,5.254 h1 r90
  text "L MOTOR BP" at -1.254,3.254 h1 r90
  text "OPTO PWR" at 25.254,-2.746 h1
  text "15V LIPO" at 36.254,-2.746 h1
Mechanical 1:
  lines w0.2: -4,104.814 -4,0.388 ccw(c0.37,0.394) 0.443,-3.975 79.614,-4 ccw(c79.608,0.378) 83.985,0.451 84,92.5 84,104.623 ; -3.989,104.573 cw(c0.387,104.646) 0.381,109.023 ; 0.186,109 79.519,109 ; 79.548,108.993 cw(c79.621,104.616) 83.998,104.623